# Altium PCB supersensor.PcbDoc
Units mm, origin at the board's own origin, x right, y up, seen from the top; angles counter-clockwise.
Board outline 65 x 56 mm, 2 copper layers (Top Layer, Bottom Layer); 41 components, 20 nets, 186 pads, 17 vias.
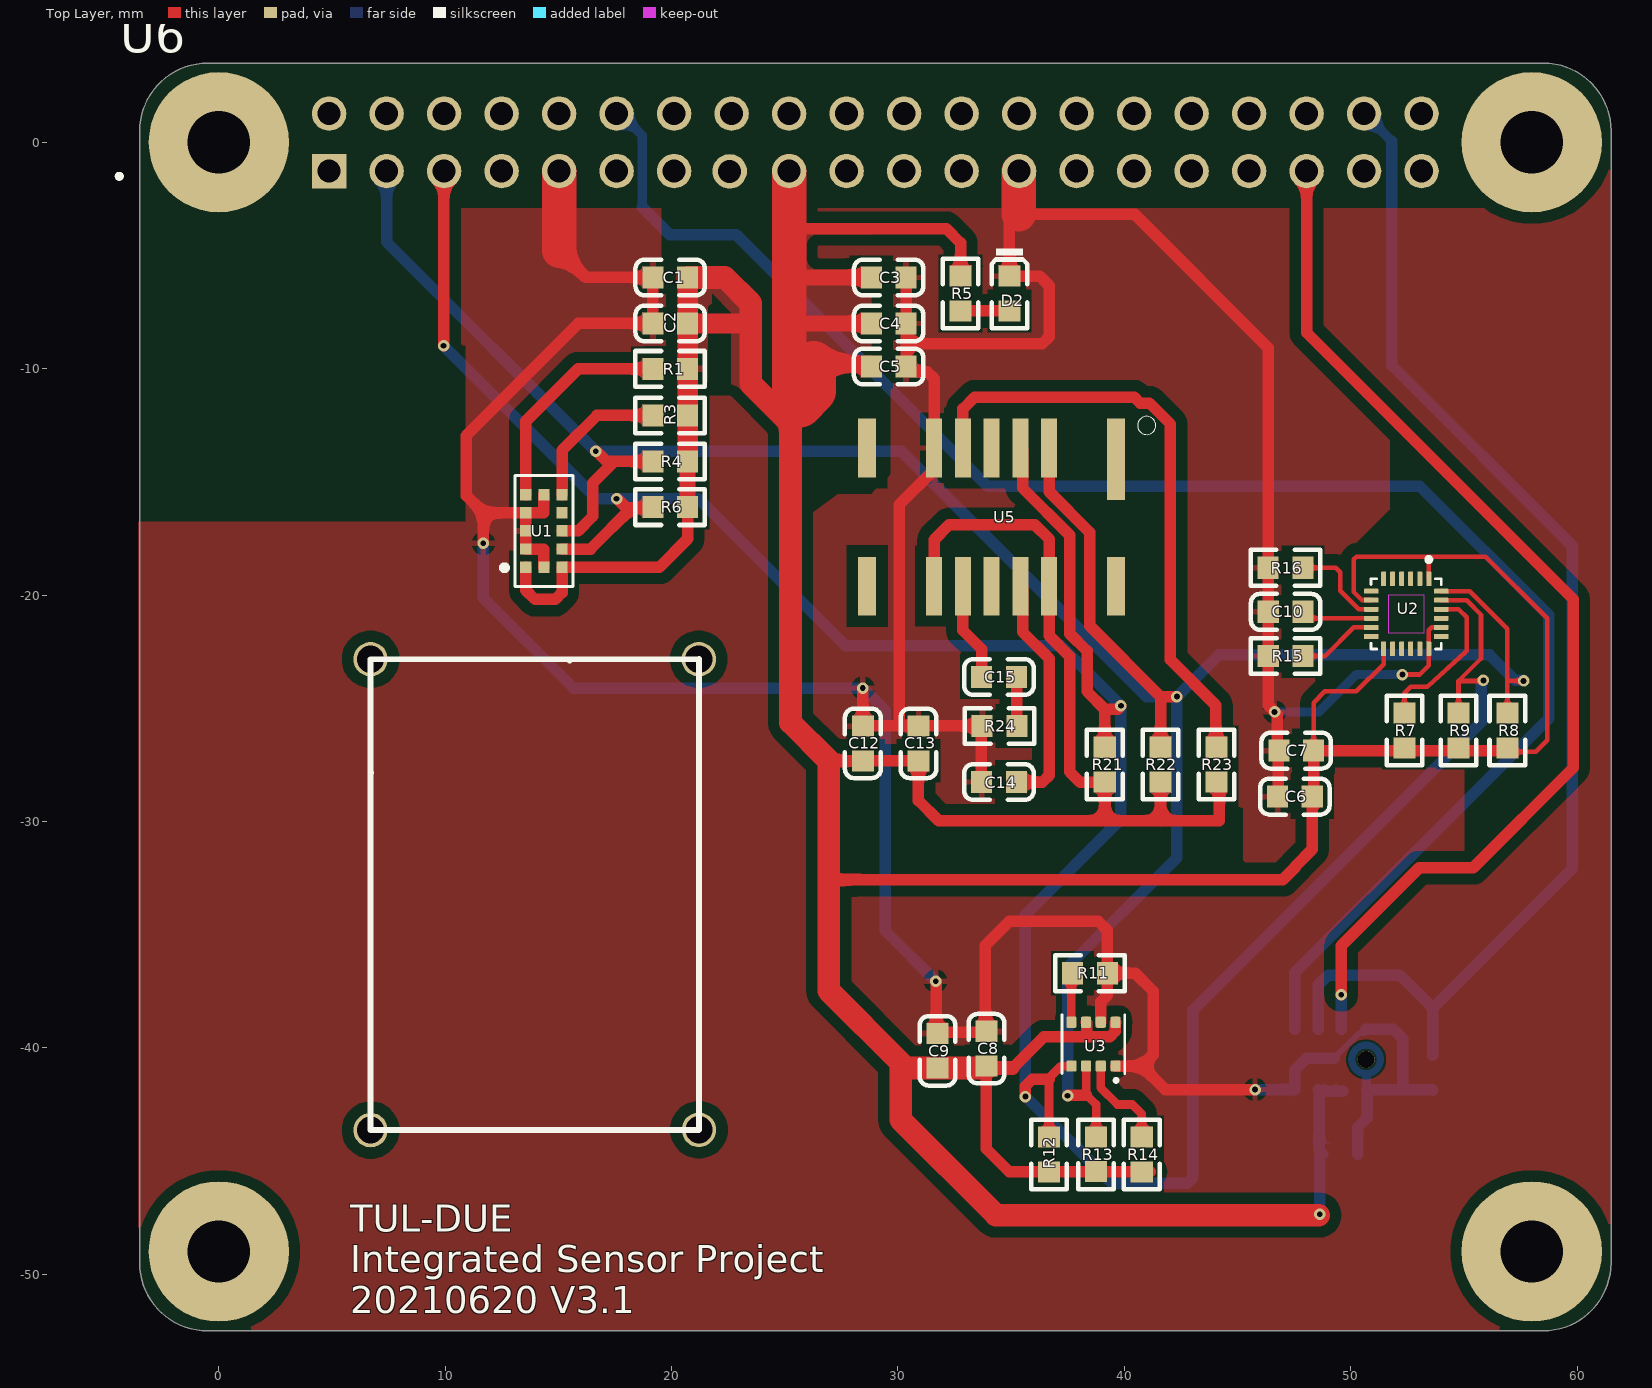
[diagram p0: Top Layer view]
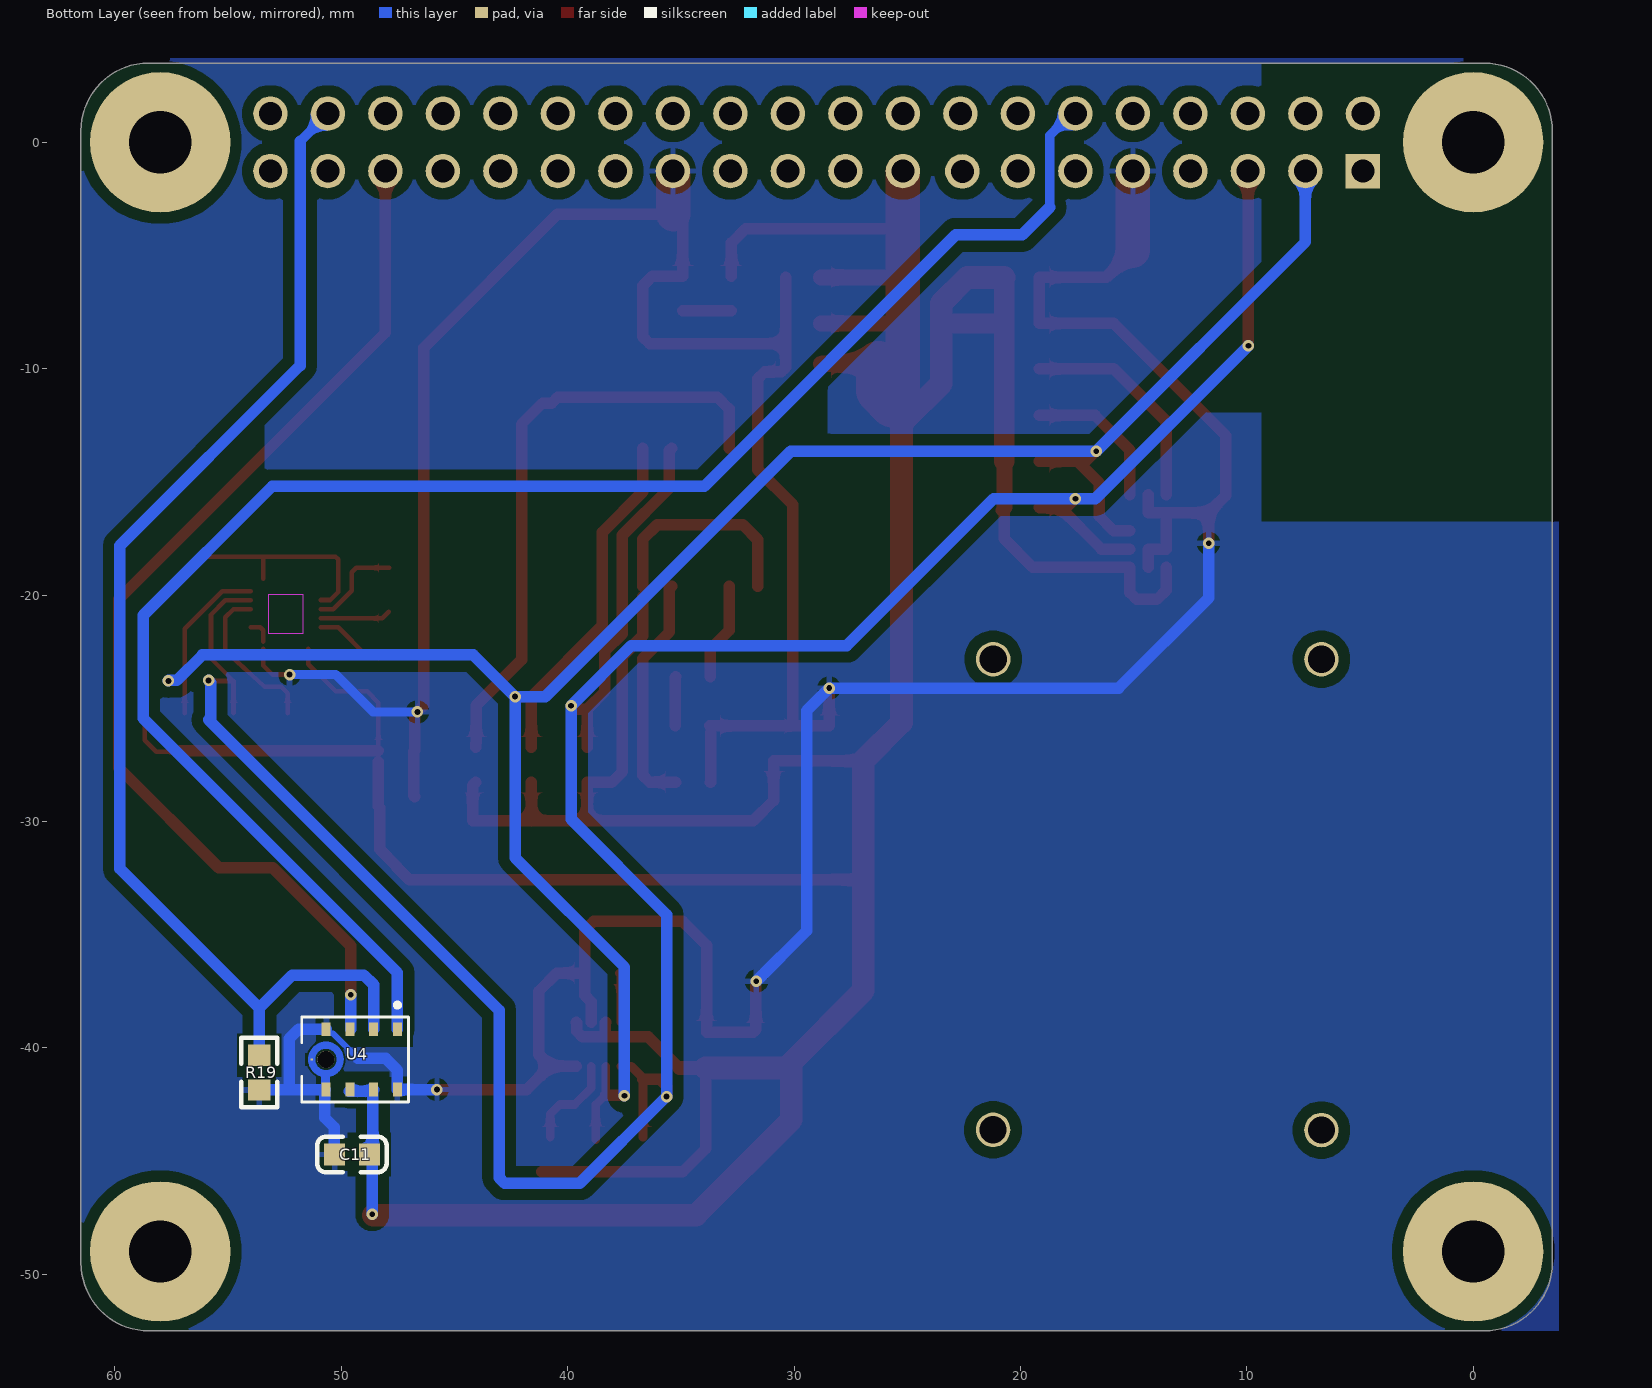
[diagram p1: Bottom Layer view, seen from below]
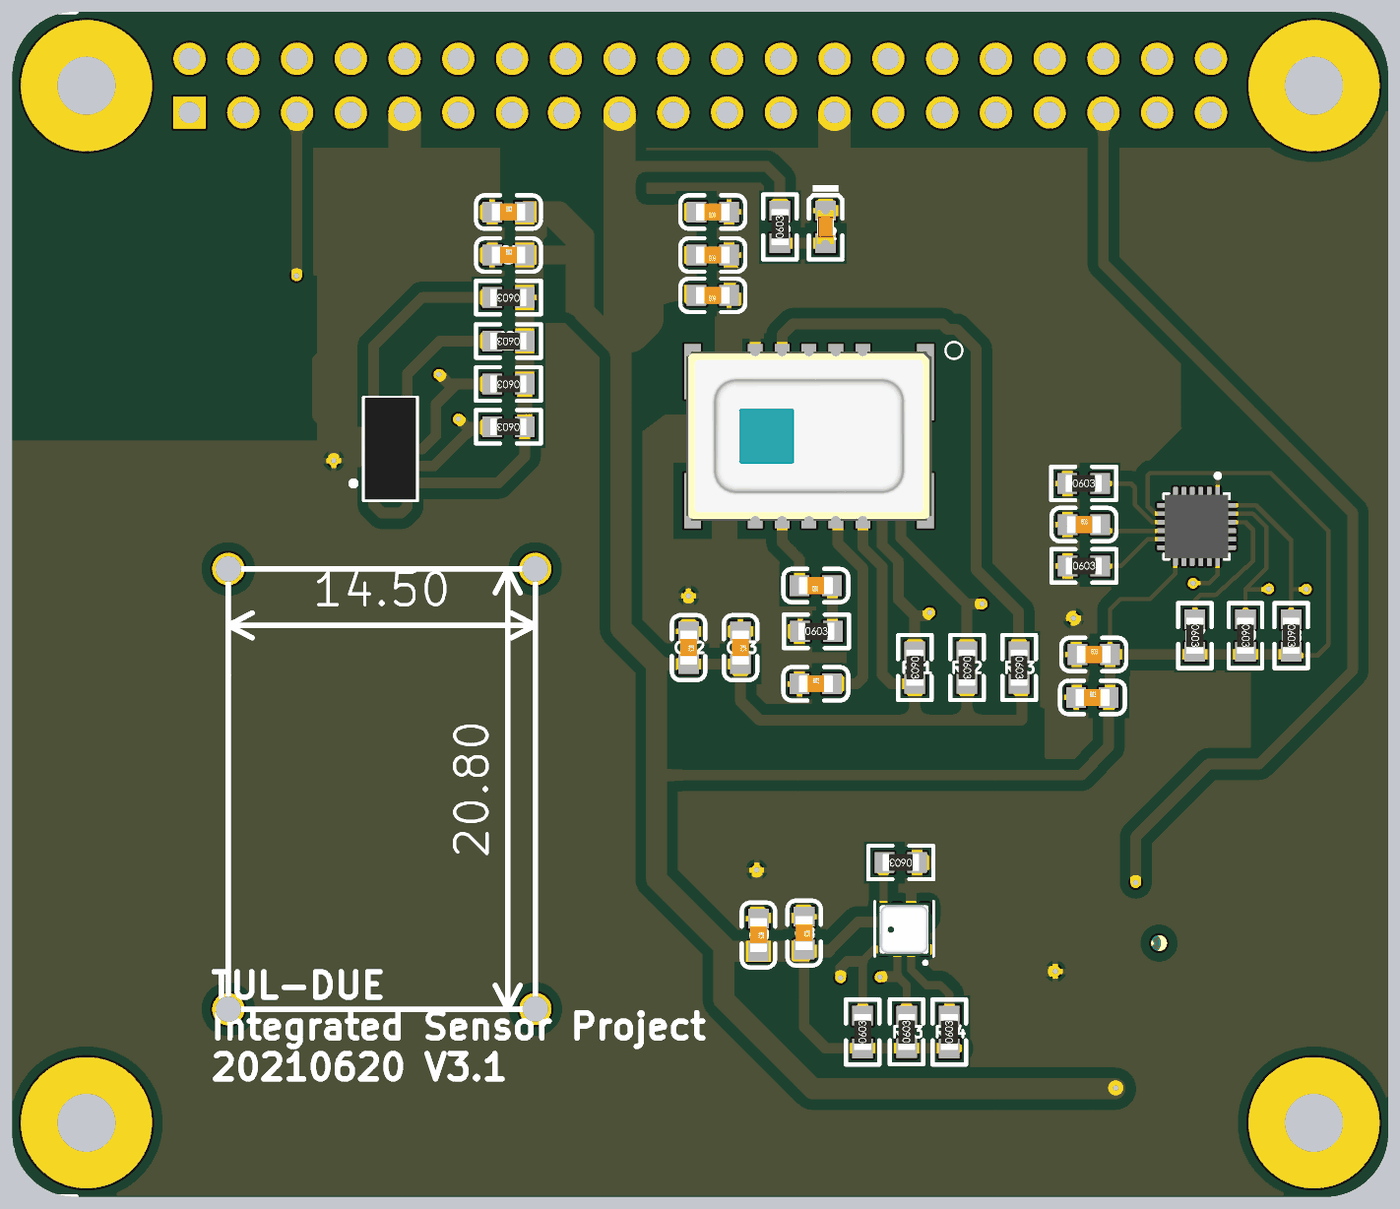
[diagram p2: 3D render of the assembled board from above, using the file's embedded part models]
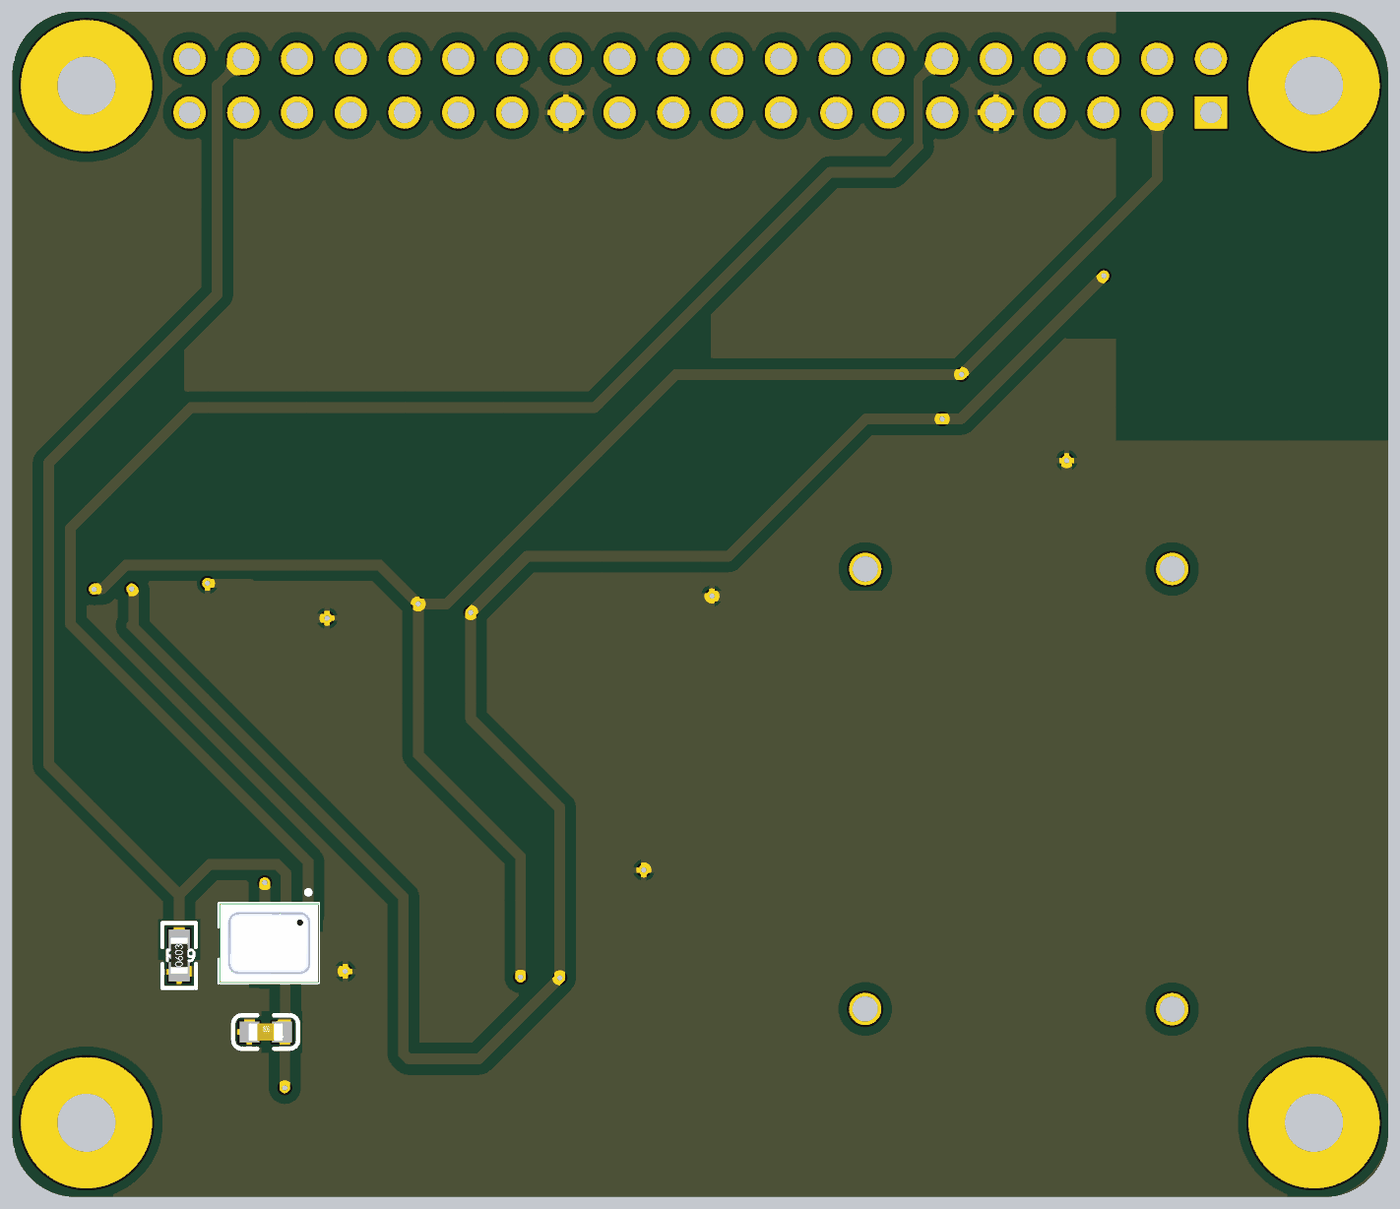
[diagram p3: 3D render of the assembled board from below, using the file's embedded part models]

## Layer stack, top to bottom
Top Solder: solder mask 0.0102, Solder Resist, Dk 3.5
Top Layer: signal copper 0.0356
Dielectric 1: dielectric 0.32, FR-4, Dk 4.8
Bottom Layer: signal copper 0.0356
Bottom Solder: solder mask 0.0102, Solder Resist, Dk 3.5

## Board outline
-3.5,-49.503 ccw(c-0.5,-49.503) -0.5,-52.503 58.5,-52.502 ccw(c58.5,-49.502) 61.5,-49.502 61.5,-49.478 61.5,0 61.5,0.5 ccw(c58.506,0.506) 58.513,3.5 -0.495,3.5 ccw(c-0.495,0.5) -3.495,0.5

## Design rules (kind name [scope] priority, off if disabled: settings)
Clearance [All] p1: gap=0.5 ignorepadtopadclearanceinfootprint=FALSE
PolygonConnect [All] p1: connectstyle=Relief reliefconductorwidth=0.254 reliefentries=4 polygonreliefangle="90 Angle" airgapwidth=0.254
RoutingVias [All] p1: holewidth=0.711 width=1.27 viastyle="Through Hole" minholewidth=0.711 minwidth=1.27 maxholewidth=0.711 maxwidth=1.27
SolderMaskExpansion [All] p1: expansion=0.102 istentingtop=FALSE
Width [All] p1: maxlimit=0.508 minlimit=0.203 preferedwidth=0.406 minimp=50.000000 maximp=50.000000 favimp=50.000000
30 further rules are at their usual default settings.

## Components (designator, comment, footprint, x,y, rotation, side; value= is the part's Value field where it differs from the comment)
C1 "" 0603_C 19.939,-5.969 r0 top
C2 "100nF" 0603_C 19.939,-8.001 r0 top
C3 "4.7uF" 0603_C 29.591,-5.969 r180 top
C4 "10uF" 0603_C 29.591,-8.001 r180 top
C5 "100nF" 0603_C 29.591,-9.906 r180 top
C6 "10nF" 0603_C 47.531,-28.905 r0 top
C7 "100nF" 0603_C 47.592,-26.873 r0 top
C8 "1uF" 0603_C 33.909,-40.039 r270 top
C9 "100nF" 0603_C 31.75,-40.132 r270 top
C10 "100nF" 0603_C 47.127,-20.738 r0 top
C11 "100nF" 0603_C 49.531,-44.712 r180 bottom
C12 "10uF" 0603_C 28.448,-26.551 r270 top
C13 "100nF" 0603_C 30.905,-26.551 r270 top
C14 "2.2uF" 0603_C 34.46,-28.26 r0 top
C15 "1uF" 0603_C 34.46,-23.619 r180 top
D2 "绿灯 0603" 0603_LED_S1 34.924,-6.676 r270 top
R1 "10KΩ" 0603_R 19.939,-10.008 r180 top
R3 "10KΩ" 0603_R 19.939,-12.065 r180 top
R4 "2.2KΩ" 0603_R 19.939,-14.097 r180 top
R5 "1KΩ" 0603_R 32.765,-6.676 r90 top
R6 "2.2KΩ" 0603_R 19.939,-16.115 r180 top
R7 "10KΩ" 0603_R 52.372,-25.984 r270 top
R8 "10KΩ" 0603_R 56.92,-25.984 r270 top
R9 "10KΩ" 0603_R 54.761,-25.984 r270 top
R11 "10KΩ" 0603_R 38.478,-36.703 r180 top
R12 "10KΩ" 0603_R 36.672,-44.712 r90 top
R13 "10KΩ" 0603_R 38.751,-44.704 r90 top
R14 "" 0603_R 40.767,-44.712 r90 top
R15 "10KΩ" 0603_R 47.127,-22.693 r0 top
R16 "10KΩ" 0603_R 47.117,-18.796 r0 top
R19 "100KΩ" 0603_R 53.62,-41.1 r90 bottom
R21 "4.7KΩ" 0603_R 39.136,-27.493 r270 top
R22 "4.7KΩ" 0603_R 41.601,-27.493 r270 top
R23 "10KΩ" 0603_R 44.066,-27.493 r270 top
R24 "20Ω" 0603_R 34.488,-25.781 r0 top
U1 "VL53L1X" VL53L1X 14.361,-17.165 r180 top
U2 "9250" MPU9250 52.451,-20.828 r270 top
U3 "280" BME280 38.634,-39.839 r270 top
U4 "441" INMP441 49.388,-40.513 r180 bottom
U5 "GRIDEYE" AMG8833 34.138,-16.558 r180 top
U6 "PIN20" PIN20 39,-24.5 r0 top

## Footprints (in the part's own frame and the unit in brackets; to place one, negate y for a bottom-side part, rotate by r counter-clockwise, add the part's x,y. Pads: shape width x height; smd on the part's side, far side on the other; paste and mask are expansions set on the pad)
0603_C [mm]
  rect 0.93x0.98 smd: 1(-0.77,0) 2(0.77,0)
  silkscreen extent -1.54,-0.79 1.54,0.79, body extent -0.8,-0.4 0.8,0.4, height 0.3
0603_LED_S1 [mm]
  rect 0.93x0.98 smd: A(0.77,0) K(-0.77,0)
  silkscreen extent -1.98,-0.79 1.53,0.79, body extent -0.8,-0.4 0.8,0.4, height 0.6
0603_R [mm]
  rect 0.93x0.98 smd: 1(-0.77,0) 2(0.77,0)
  silkscreen extent -1.53,-0.79 1.54,0.79, body extent -0.85,-0.4 0.85,0.4, height 0.56
AMG8833 [mm]
  rect 0.8x3.6 smd: 1(-5.5,-2.55)
  rect 0.7x2.6 smd: 2(-2.54,-3.05) 3(-1.27,-3.05) 4(0,-3.05) 5(1.27,-3.05) 6(2.54,-3.05) 9(2.54,3.05) 10(1.27,3.05) 11(0,3.05) 12(-1.27,3.05) 13(-2.54,3.05)
  rect 0.8x2.6 smd: 7(5.5,-3.05) 8(5.5,3.05) 14(-5.5,3.05)
  silkscreen extent -7.25,-4.45 -6.45,-3.65, body extent -5.8,-4 5.8,4, height 4.3
BME280 [mm]
  rrect25% 0.49x0.45 smd: 1(0.97,0.975) 2(0.97,0.325) 3(0.97,-0.325) 4(0.97,-0.975) 5(-0.97,-0.975) 6(-0.97,-0.325) 7(-0.97,0.325) 8(-0.97,0.975)
  silkscreen extent -1.3,-1.39 1.65,1.38, body extent -1.22,-1.25 1.28,1.25, height 1
INMP441 [mm]
  rect 0.4x0.6 smd paste-1: 1(1.87,1.33) 2(0.82,1.33) 3(-0.23,1.33) 4(-1.28,1.33) 6(-1.28,-1.33) 7(-0.23,-1.33) 8(0.82,-1.33) 9(1.87,-1.33)
  rect 0.1x0.1 smd paste-1 mask+0: 5(-1.92,0)
  round 0.75 hole 0.75 unplated: ""(-1.29,0)
  Top Layer region: 243 vertices and 0 holes, not listed, extent -2.07,-0.78 -0.51,0.78
  silkscreen extent -2.36,-1.88 2.36,2.5, body extent -2.33,-1.88 2.39,1.88, height 1.05
MPU9250 [mm]
  rrect25% 0.64x0.22 smd: 1(-1.545,1) 2(-1.545,0.6) 3(-1.545,0.2) 4(-1.545,-0.2) 5(-1.545,-0.6) 6(-1.545,-1) 13(1.545,-1) 14(1.545,-0.6) 15(1.545,-0.2) 16(1.545,0.2) 17(1.545,0.6) 18(1.545,1)
  rrect25% 0.22x0.64 smd: 7(-1,-1.545) 8(-0.6,-1.545) 9(-0.2,-1.545) 10(0.2,-1.545) 11(0.6,-1.545) 12(1,-1.545) 19(1,1.545) 20(0.6,1.545) 21(0.2,1.545) 22(-0.2,1.545) 23(-0.6,1.545) 24(-1,1.545)
  Keep-Out Layer region: 0.85,-0.77 -0.85,-0.77 -0.85,0.77 0.85,0.77
  Keep-Out Layer region: 0.85,-0.77 -0.85,-0.77 -0.85,0.77 0.85,0.77
  silkscreen extent -2.5,-1.55 1.55,1.55, body extent -1.5,-1.5 1.5,1.5, height 1
PIN20 [mil]
  rect 60x60 hole 40: 1(-1343.7,914.57)
  round 60 hole 40: 2(-1343.7,1014.57) 3(-1243.7,914.57) 4(-1243.7,1014.57) 5(-1143.7,914.57) 6(-1143.7,1014.57) 7(-1043.7,914.57) 8(-1043.7,1014.57) 9(-943.7,914.57) 10(-943.7,1014.57) 11(-843.7,914.57) 12(-843.7,1014.57) 13(-743.7,914.57) 14(-743.7,1014.57) 15(-647,914) 16(-643.7,1014.57) 17(-543.7,914.57) 18(-543.7,1014.57) 19(-443.7,914.57) 20(-443.7,1014.57) 21(-343.7,914.57) 22(-343.7,1014.57) 23(-243.7,914.57) 24(-243.7,1014.57) 25(-143.7,914.57) 26(-143.7,1014.57) 27(-43.7,914.57) 28(-43.7,1014.57) 29(56.3,914.57) 30(56.3,1014.57) 31(156.3,914.57) 32(156.3,1014.57) 33(256.3,914.57) 34(256.3,1014.57) 35(356.3,914.57) 36(356.3,1014.57) 37(456.3,914.57) 38(456.3,1014.57) 39(556.3,914.57) 40(556.3,1014.57)
  round 244.09 hole 108.27: S1(-1535.43,964.57) S2(748.03,964.57) S3(748.03,-964.57) S4(-1535.43,-964.57)
  silkscreen extent -1713,902 -1705,909
VL53L1X [mm]
  rect 0.5x0.5 smd: 1(0.8,1.6) 2(0.8,0.8) 3(0.8,0) 4(0.8,-0.8) 5(0.8,-1.6) 6(0,-1.6) 7(-0.8,-1.6) 8(-0.8,-0.8) 9(-0.8,0) 10(-0.8,0.8) 11(-0.8,1.6) 12(0,1.6)
  silkscreen extent -1.28,-2.45 1.87,2.45, body extent -1.2,-2.41 1.2,2.39, height 1.4

## Part data
C1 C3: library part "0603 4.7uF (475) 10% 16V", "贴片电容", Package=0603, SuppliersPartNumber=C19666, ComponentLink1Description=供应商链接, ComponentLink1URL=http://www.szlcsc.com/product/details_20375.html, Supplier=LC
C2 C5 C7 C9 C10 C11 C13: library part "0603 100nF (104) 10% 50V", "贴片电容", Package=0603, SuppliersPartNumber=C14663, ComponentLink1Description=供应商链接, ComponentLink1URL=http://www.szlcsc.com/product/details_15331.html, Supplier=LC
C4 C12: library part "0603 10uF (106) 10% 10V", "贴片电容", Package=0603, SuppliersPartNumber=C19702, ComponentLink1Description=供应商链接, ComponentLink1URL=http://www.szlcsc.com/product/details_20411.html, Supplier=LC
C6: library part "0603 10nF (103) 10% 50V", "贴片电容", Package=0603, SuppliersPartNumber=C57112, ComponentLink1Description=供应商链接, ComponentLink1URL=http://www.szlcsc.com/product/details_58143.html, Supplier=LC
C8 C15: library part "0603 1uF (105) 10% 50V", "贴片电容", Package=0603, SuppliersPartNumber=C15849, ComponentLink1Description=供应商链接, ComponentLink1URL=http://www.szlcsc.com/product/details_16531.html, Supplier=LC
C14: library part "0603 2.2uF (225) 10% 16V", "贴片电容", Package=0603, SuppliersPartNumber=C23630, ComponentLink1Description=供应商链接, ComponentLink1URL=http://www.szlcsc.com/product/details_24366.html, Supplier=LC
D2: library part "0603 绿灯", "发光二极管", Package=0603, SuppliersPartNumber=C72043, ComponentLink1Description=供应商链接, ComponentLink1URL=http://www.szlcsc.com/product/details_73152.html, Supplier=LC
R1 R3 R7 R8 R9 R11 R12 R13 R14 R15 R16 R23: library part "0603 10KΩ (1002) 1%", "贴片电阻", Package=0603, SuppliersPartNumber=C25804, ComponentLink1Description=供应商链接, ComponentLink1URL=http://www.szlcsc.com/product/details_26547.html, Supplier=LC
R4 R6: library part "0603 2.2KΩ (2201) 1%", "贴片电阻", Package=0603, SuppliersPartNumber=C4190, ComponentLink1Description=供应商链接, ComponentLink1URL=http://www.szlcsc.com/product/details_4597.html, Supplier=LC
R5: library part "0603 1KΩ (1001) 1%", "贴片电阻", Package=0603, SuppliersPartNumber=C21190, ComponentLink1Description=供应商链接, ComponentLink1URL=http://www.szlcsc.com/product/details_21904.html, Supplier=LC
R19: library part "0603 100KΩ (1003) 1%", "贴片电阻", Package=0603, SuppliersPartNumber=C25803, ComponentLink1Description=供应商链接, ComponentLink1URL=http://www.szlcsc.com/product/details_26546.html, Supplier=LC
R21 R22: library part "0603 4.7KΩ (4701) 1%", "贴片电阻", Package=0603, SuppliersPartNumber=C23162, ComponentLink1Description=供应商链接, ComponentLink1URL=http://www.szlcsc.com/product/details_23889.html, Supplier=LC
R24: library part "0603 20Ω (20R0) 1%", "贴片电阻", Package=0603, SuppliersPartNumber=C22950, ComponentLink1Description=供应商链接, ComponentLink1URL=http://www.szlcsc.com/product/details_23677.html, Supplier=LC
U1 U5: "IC"
U2: library part MPU9250, "IC"
U3: library part BME280, "IC"
U4: library part INMP441, "IC"
U6: "BCM2837B0 Raspberry Pi 3 Model B+ - ARM庐 Cortex庐-A53, VideoCore MPU Embedded Evaluation Board", Package="Raspberry Pi", Check_prices=https://www.snapeda.com/parts/RASPBERRY%20PI%203%20MODEL%20B+/Raspberry%20Pi/view-part/4299836/?ref=eda, Digi-Key_Part_Number=1690-1025-ND, MF="Raspberry Pi", MP="RASPBERRY PI 3 MODEL B+", SnapEDA_Link=https://www.snapeda.com/parts/RASPBERRY%20PI%203%20MODEL%20B+/Raspberry%20Pi/view-part/4299836/?ref=snap

## Free pads (board coordinates)
  round 1.524 hole 1.2: 4(6.702,-43.635) 4(6.702,-22.835) 4(21.202,-22.835) 4(21.209,-43.622)

## Via types
v1: diameter 0.508, hole 0.254, Top Layer to Bottom Layer, 17 vias

## Nets (pads, with @x,y where several pads share a name; then routed paths per layer and width w, separated by ;. In a path a pad name is that pad's centre, name@x,y a point inside that pad or via, vN(x,y) a via of type N, cw(c..) or ccw(c..) an arc to the next point about the centre after c; other vN are vias at no path point)
3.3V: C1.2 C2.2 C3.2 C4.2 C5.2 C6.2 C7.2 C8.2 C9.2 C11.2 C12.2 C13.2 R1.1 R3.1 R4.1 R5.2 R6.1 R7.2 R8.2 R9.2 R12.1 R13.1 R14.1 R21.2 R22.2 R23.2 U1.1 U1.11 U2.1 U2.8 U2.13 U3.6 U3.8 U4.7 U4.8 U5.9 U5.13 U6.17 | length 259.1
  Top Layer w0.203: 48.362,-27.363 C7.2 48.362,-24.749 48.854,-24.257 50.244,-24.257 51.451,-23.05 U2.13 ; U2.8 50.898,-20.22 50.489,-20.22 50.134,-19.865 50.134,-18.425 50.254,-18.306 53.451,-18.306 ; U2.1 53.451,-18.306 ; R8.2@57.081,-26.873 57.132,-26.924 58.166,-26.924 58.674,-26.416 58.674,-21.028 55.952,-18.306 53.451,-18.306
  Top Layer w0.406: 25.19,-11.135 25.658,-11.603
  Top Layer w0.508: U1.1 13.561,-19.784 13.97,-20.193 14.859,-20.193 15.161,-19.891 U1.11 19.462,-18.765 20.709,-17.518 R6.1 R6.1@20.85,-16.256 ; 25.273,-5.969 25.273,-8.001 25.273,-8.781 26.271,-9.779 ; 25.516,-5.969 25.516,-3.81 32.131,-3.81 32.765,-4.444 R5.2 ; 26.94,-32.572 46.999,-32.572 47.571,-32.001 47.571,-31.964 48.301,-31.234 48.301,-29.395 48.362,-29.334 48.362,-28.905 48.362,-27.363 ; 26.94,-27.321 C12.2 C13.2 30.905,-29.079 31.797,-29.972 39.136,-29.972 ; 30.115,-40.656 30.353,-40.894 ; U5.9 31.598,-17.551 32.258,-16.891 36.043,-16.891 36.678,-17.526 U5.13 ; C8.2@33.909,-40.956 33.909,-44.466 34.925,-45.482 R12.1 38.751,-45.482 R14.1 R14.1@41.148,-45.482 ; 35.068,-40.894 36.441,-39.521 38.261,-39.521 ; U5.13@36.678,-20.066 36.678,-21.798 37.592,-22.713 37.592,-27.813 38.042,-28.263 R21.2 39.136,-29.972 ; U3.6 38.328,-38.888 38.328,-39.454 38.261,-39.521 ; U3.8 39.591,-38.888 39.591,-39.28 39.35,-39.521 38.261,-39.521 ; R22.2 41.601,-29.972 ; R23.2 44.196,-28.393 44.196,-29.972 41.601,-29.972 ; C7.2 52.372,-26.873 54.761,-26.873 R8.2@57.081,-26.873 ; v1@48.594,-47.391 v1(48.632,-47.353) ; 39.136,-29.972 41.601,-29.972
  Top Layer w0.6: C8.2@33.909,-40.894 35.068,-40.894
  Top Layer w0.7: R6.1 R4.1 ; 25.313,-8.001 C4.2 ; 25.516,-5.969 C3.2 ; 26.271,-9.779 C5.2@28.821,-9.779
  Top Layer w0.9: R4.1 R3.1 R1.1 C2.2 ; C1.2 C2.2 ; 22.976,-8.001 C2.2
  Top Layer w1: C1.2 22.352,-5.969 23.495,-7.112 23.495,-10.668 25.141,-12.314 ; 25.252,-12.267 25.252,-25.633 26.94,-27.321 26.94,-32.572 26.94,-37.481 30.115,-40.656 30.115,-43.177 34.329,-47.391 v1@48.594,-47.391 ; 30.353,-40.894 31.75,-40.894 C8.2@33.909,-40.894
  Top Layer w1.524: 25.19,-11.135 25.19,-8.781 25.19,-8.001 25.19,-5.969 25.19,-3.81 U6.17
  Top Layer w2: 25.658,-11.603 26.271,-10.99 26.271,-9.779
  Bottom Layer w0.508: U4.8 48.605,-41.88 48.605,-44.557 C11.2 48.632,-44.841 v1(48.632,-47.353) ; U4.8@48.608,-41.923 U4.7@49.65,-41.923
GND: C1.1 C2.1 C3.1 C4.1 C5.1 C6.1 C7.1 C8.1 C9.1 C10.1 C11.1 C12.1 C13.1 C14.1 D2.K R11.1 R15.1 R16.1 R19.1 R24.1 U1.2 U1.3 U1.4 U1.6 U1.12 U2.18 U2.20 U3.1 U3.7 U4.4 U4.5 U4.6 U4.9 U5.6 U6.9 U6.25 | length 204.3
  Top Layer w0.203: v1(52.285,-23.51) 53.051,-23.51 53.451,-23.11 U2.18 ; 53.451,-22.053 53.451,-21.559 53.582,-21.428 U2.20
  Top Layer w0.508: v1(11.684,-17.715) 11.684,-16.365 ; U1.12 14.361,-17.965 U1.2 U1.3 U1.4 ; U1.6 14.361,-16.365 U1.4 ; 15.03,-4.791 16.208,-5.969 C1.1 C2.1 15.875,-8.001 10.922,-12.954 10.922,-15.603 11.684,-16.365 ; v1(28.448,-24.109) C12.1 30.069,-25.781 ; C3.1 C4.1 30.361,-8.89 ; v1(31.666,-37.057) 31.686,-37.076 31.686,-39.205 31.796,-39.316 33.863,-39.316 33.863,-35.474 34.92,-34.417 38.854,-34.417 39.248,-34.811 R11.1 ; C14.1@33.674,-28.277 C14.1 33.679,-28.248 R24.1@33.679,-26.09 ; R24.1 C13.1 30.069,-25.781 ; 35.343,-3.18 35.373,-3.18 ; U3.7 38.959,-37.973 39.248,-37.684 R11.1 ; U3.1 40.767,-40.809 ; v1(45.777,-41.843) 41.801,-41.843 40.767,-40.809 ; v1(46.634,-25.162) 46.634,-25.146 46.357,-24.869 R15.1 46.352,-22.688 46.352,-20.738 46.352,-18.801 R16.1 46.347,-9.07 40.457,-3.18 35.373,-3.18 ; v1@46.642,-25.154 46.761,-25.273 46.761,-26.873 46.791,-26.903 46.791,-28.874 C6.1 ; 11.684,-16.365 U1.4 ; 30.069,-25.781 30.05,-25.762 30.05,-16.006 31.598,-14.458 U5.6 31.598,-10.44 31.3,-10.142 30.572,-10.142 30.361,-9.931 C5.1 30.361,-8.89 ; 30.361,-8.89 36.38,-8.89 36.678,-8.592 36.678,-6.326 36.576,-6.224 36.259,-5.906 D2.K 34.924,-3.628 35.373,-3.18 ; R11.1 40.48,-36.703 41.269,-37.492 41.269,-40.308 40.767,-40.809
  Top Layer w1.524: 15.03,-4.791 U6.9 ; 35.343,-3.18 U6.25@35.343,-1.277
  Bottom Layer w0.254: 49.268,-40.466 50.377,-39.356 50.595,-39.356 50.668,-39.283 U4.4
  Bottom Layer w0.406: v1(46.634,-25.162) 48.599,-25.162 50.251,-23.51 v1(52.285,-23.51) ; 50.698,-41.292 50.698,-41.849 50.698,-41.873 U4.6@50.737,-41.912
  Bottom Layer w0.508: v1(11.684,-17.715) 11.684,-20.129 15.664,-24.109 v1(28.448,-24.109) 29.448,-25.109 29.448,-34.838 v1(31.666,-37.057) ; v1(45.777,-41.843) U4.9 47.518,-40.99 48.043,-40.466 49.268,-40.466 ; C11.1 50.301,-43.518 50.737,-43.082 U4.6@50.737,-41.912 ; U4.4 51.887,-39.183 52.297,-39.593 52.297,-41.849 ; U4.6@50.698,-41.849 52.297,-41.849 ; R19.1 53.6,-41.849 52.297,-41.849
IIC_SCL: R6.2 R9.1 R12.2 R21.1 U1.10 U2.23 U3.4 U5.3 U6.5 | length 134.1
  Top Layer w0.203: U2.23 55.12,-20.228 55.753,-20.861 55.753,-22.805 54.761,-23.796 ; R9.1 54.761,-23.796 ; v1(55.864,-23.773) 55.84,-23.796 54.761,-23.796
  Top Layer w0.381: 36.64,-41.367 37.187,-40.82 37.649,-40.82 U3.4 ; R12.2 36.672,-41.382 36.672,-41.367
  Top Layer w0.508: v1(9.927,-8.983) 9.939,-8.971 U6.5@9.939,-1.281 ; U1.10 16.42,-17.965 18.24,-16.146 ; v1(17.566,-15.747) 17.594,-15.747 17.992,-16.146 18.24,-16.146 ; R6.2 19.139,-16.146 18.24,-16.146 ; U5.3 35.504,-13.604 35.504,-15.269 37.592,-17.358 37.592,-21.707 38.354,-22.469 38.354,-24.257 39.136,-25.039 ; v1(35.631,-42.151) 35.631,-41.69 35.938,-41.382 36.672,-41.382 ; R21.1 39.136,-25.039 ; v1(39.847,-24.895) 39.702,-25.039 39.136,-25.039
  Bottom Layer w0.508: v1(9.927,-8.983) 16.692,-15.747 v1(17.566,-15.747) 21.186,-15.747 27.672,-22.233 37.184,-22.233 v1(39.847,-24.895) 39.847,-29.906 35.631,-34.122 v1(35.631,-42.151) 39.461,-45.982 42.787,-45.982 43.025,-45.744 43.025,-38.35 55.864,-25.511 ; 55.769,-25.511 55.769,-23.868 v1(55.864,-23.773)
IIC_SDA: R4.2 R8.1 R13.2 R22.1 U1.9 U2.24 U3.3 U5.2 U6.3 | length 118
  Top Layer w0.203: U2.24 55.259,-19.828 56.92,-21.489 R8.1 ; 56.924,-23.792 v1(57.636,-23.792)
  Top Layer w0.381: U3.3 38.309,-42.063 38.751,-42.505 R13.2 R13.2@38.751,-44.061
  Top Layer w0.508: U1.9 15.871,-17.165 16.51,-16.527 16.51,-15.057 17.47,-14.097 ; v1(16.65,-13.643) 16.678,-13.643 17.132,-14.097 17.47,-14.097 ; R4.2 17.47,-14.097 ; U5.2 36.678,-15.437 38.476,-17.236 38.476,-21.361 41.601,-24.486 ; v1(37.491,-42.119) 37.51,-42.099 38.273,-42.099 38.309,-42.063 ; R22.1 41.601,-24.486 ; v1(42.325,-24.486) 41.601,-24.486
  Bottom Layer w0.508: U6.3 7.41,-4.402 v1(16.65,-13.643) 30.142,-13.643 40.985,-24.486 v1(42.325,-24.486) ; v1(37.491,-42.119) 37.491,-36.433 42.325,-31.598 v1(42.325,-24.486) ; v1(57.636,-23.792) 57.616,-23.773 57.264,-23.773 56.135,-22.643 44.168,-22.643 v1(42.325,-24.486)
Mic_SCK: U4.1 U6.12 | length 75
  Bottom Layer w0.406: U6.12@17.737,1.27 18.706,0.301 18.706,-2.869
  Bottom Layer w0.508: 18.706,-2.869 19.924,-4.086 22.854,-4.086 33.968,-15.201 53.058,-15.201 58.754,-20.896 58.754,-25.448 47.518,-36.684 U4.1
Mic_SD: R19.2 U4.2 U6.38 | length 55.8
  Bottom Layer w0.406: U6.38 51.823,0.037
  Bottom Layer w0.508: U4.2 48.568,-37.219 49.002,-36.785 52.163,-36.785 53.62,-38.242 ; 51.823,0.037 51.823,-9.862 59.783,-17.822 59.783,-32.079 53.62,-38.242 ; R19.2 53.62,-38.242
Mic_WS: U4.3 U6.35 | length 48.4
  Top Layer w0.508: U6.35 48.05,-8.405 59.82,-20.175 59.82,-27.637 55.41,-32.047 53.027,-32.047 49.578,-35.496 v1(49.578,-37.656)
  Bottom Layer w0.508: U4.3@49.576,-39.185 49.578,-39.183 v1(49.578,-37.656)
NetC10_2: C10.2 U2.10 | length 3.1
  Top Layer w0.203: C10.2 48.187,-21.028 U2.10
NetC14_2: C14.2 U5.12 | length 10.5
  Top Layer w0.508: C14.2 36.38,-28.26 36.678,-27.962 36.678,-22.804 35.504,-21.63 35.504,-19.704 U5.12
NetC15_1: C15.1 R24.2 | length 2.2
  Top Layer w0.508: C15.1 35.244,-23.633 35.244,-25.767 R24.2
NetC15_2: C15.2 U5.10 | length 4.4
  Top Layer w0.508: U5.10 32.868,-21.565 33.69,-22.387 C15.2
NetD2_A: D2.A R5.1 | length 2.2
  Top Layer w0.508: R5.1 D2.A
NetR1_2: R1.2 U1.5 | length 9.8
  Top Layer w0.508: U1.5 13.561,-12.319 15.872,-10.008 R1.2
NetR3_2: R3.2 U1.7 | length 6.6
  Top Layer w0.508: U1.7 15.161,-13.607 16.703,-12.065 R3.2
NetR7_1: R7.1 U2.22 | length 7.1
  Top Layer w0.203: R7.1 52.372,-24.332 52.651,-24.053 53.296,-24.053 53.374,-24.053 53.433,-24 55.057,-22.517 55.06,-22.514 55.12,-22.454 55.12,-20.987 54.761,-20.628 U2.22
NetR11_2: R11.2 U3.5 | length 2.2
  Top Layer w0.381: U3.5 37.659,-36.752 R11.2
NetR14_2: R14.2 U3.2 | length 4.3
  Top Layer w0.381: U3.2 38.959,-41.77 39.694,-42.505 40.346,-42.505 40.767,-42.926 R14.2
NetR15_2: R15.2 U2.11 | length 3.5
  Top Layer w0.203: R15.2@47.972,-22.693 48.869,-22.693 50.134,-21.428 U2.11
NetR16_2: R16.2 U2.9 | length 4.3
  Top Layer w0.203: R16.2 49.346,-18.796 49.54,-18.991 49.54,-19.81 50.35,-20.62 50.898,-20.62 U2.9
NetR23_1: R23.1 U5.5 | length 26.7
  Top Layer w0.508: U5.5 32.868,-11.779 33.392,-11.254 40.433,-11.254 40.695,-11.517 41.108,-11.517 42.037,-12.446 42.037,-22.86 44.041,-24.864 44.041,-26.512 44.066,-26.537 R23.1
pads on no net: U1.8 U2.2 U2.3 U2.4 U2.5 U2.6 U2.7 U2.12 U2.14 U2.15 U2.16 U2.17 U2.19 U2.21 U4. U5.1 U5.4 U5.7 U5.8 U5.11 U5.14 U6.1 U6.2 U6.4 U6.6 U6.7 U6.8 U6.10 U6.11 U6.13 U6.14 U6.15 U6.16 U6.18 U6.19 U6.20 U6.21 U6.22 U6.23 U6.24 U6.26 U6.27 U6.28 U6.29 U6.30 U6.31 U6.32 U6.33 U6.34 U6.36 U6.37 U6.39 U6.40 U6.S1 U6.S2 U6.S3 U6.S4

## Polygon pours and split planes (outlines as drawn)
GND on Top Layer "GND_L01_P000" (solid, remove dead copper, pour order 0): -3.409,3.5 61.525,3.5 61.521,3.496 61.521,-52.446 -0.443,-52.446 -0.5,-52.503 -0.629,-52.374 -3.57,-52.374 -3.57,0.425 -3.495,0.5
3.3V on Top Layer "3.3V_L01_P006" (solid, remove dead copper, pour order 6): 20.709,-5.969 20.709,-8.001 21.199,-8.491 23.495,-8.491 23.495,-7.112 22.352,-5.969
3.3V on Top Layer "3.3V_L01_P005" (solid, remove dead copper, pour order 5): 20.709,-5.969 20.709,-16.256 21.058,-16.605 25.252,-16.605 25.252,-12.267 23.495,-10.509 23.495,-7.112 22.352,-5.969
3.3V on Top Layer "3.3V_L01_P004" (solid, remove dead copper, pour order 4): 28.821,-9.906 28.821,-3.575 28.586,-3.81 25.273,-3.81 25.273,-8.613 25.141,-8.745 26.175,-9.779 26.271,-9.779
GND on Bottom Layer "GND_L02_P002" (solid, remove dead copper, pour order 2): -3.409,3.5 -3.792,3.116 -3.792,-52.503 61.464,-52.503 61.521,-52.446 61.5,-52.424 61.5,3.704 -3.204,3.704 -3.409,3.5

## Other copper
Top Layer:
  pour cut-out: 51.723,-13.081 51.723,-16.147 51.755,-16.178 50.134,-17.799 50.134,-17.872 55.573,-17.872 55.978,-17.468 55.978,-16.835
  pour cut-out: 55.011,-31.478 55.011,-27.637 59.092,-27.637
  pour cut-out: 45.256,-29.428 45.259,-29.431 45.259,-31.715 28.063,-31.715 27.958,-31.61 27.958,-28.133 30.081,-28.133 30.415,-28.467 30.415,-29.672 31.395,-30.652 44.556,-30.652 44.556,-29.781 45.004,-29.334
  pour cut-out: 8.399,-0.119 8.399,-2.918 56.687,-2.918 56.778,-2.827 56.778,2.849 8.385,2.849 8.218,2.682
  pour cut-out: 21.766,-6.656 22.639,-7.529 22.639,-11.135 22.577,-11.198 21.604,-11.198 21.604,-7.274 21.766,-7.112
  pour cut-out: 19.544,-2.522 24.428,-2.609 24.428,-6.995 24.311,-7.112 22.678,-5.479 19.544,-5.225
  pour cut-out: 28.01,-11.135 26.952,-11.603 25.842,-12.713 26.01,-16.527 27.331,-15.538 28.81,-15.538 29.688,-14.661 29.688,-10.689
  pour cut-out: 9.362,-9.453 10.27,-9.453 10.751,-8.971 10.901,-8.971 10.901,-16.74 10.922,-16.762 8.89,-16.762 8.89,-9.836 9.362,-9.365
  pour cut-out: -3.5,3.5 -3.5,-16.708 -3.553,-16.762 9.362,-16.762 9.362,3.326 9.188,3.5
Bottom Layer:
  pour cut-out: 28.494,-10.923 30.367,-12.796 28.561,-12.796 28.502,-12.854 28.502,-10.932
  pour cut-out: 9.385,-9.503 11.729,-11.847 11.729,-11.937 11.719,-11.947 9.362,-11.947 9.362,-9.625 9.376,-9.611
  pour cut-out: -3.456,-16.762 -5.924,-16.762 -5.988,-16.826 -6.114,-16.7 -6.114,2.167 -3.23,2.167 -3.204,2.192 -0.097,-0.915 -0.097,-16.763 -0.097,-16.764
  pour cut-out: -3.57,-16.779 -3.553,-16.762 9.362,-16.762 9.362,-7.133 6.83,-4.601 6.668,-4.601 6.668,-2.505 6.394,-2.231 6.394,3.5 -3.45,3.5 -3.45,-16.762
  pour cut-out: -3.45,-16.762 9.362,-16.762 9.362,3.5 -3.45,3.5
  pour cut-out: 53.378,-12.388 53.378,-14.694 58.832,-20.148 59.176,-20.148 59.176,-17.984 53.581,-12.389 53.378,-12.389

## Silkscreen, mask and mechanical layers (free items; w line width, h text height)
Top Overlay:
  lines w0.254: 6.702,-27.9 cw(c6.771,-27.9) 6.722,-27.851 ; 15.372,-22.835 cw(c15.372,-23.017) 15.5,-22.888 ; 21.202,-43.635 6.702,-43.635 6.702,-22.835 21.202,-22.835 ; 21.209,-43.622 21.209,-22.822
  text "TUL-DUE / Integrated Sensor Project / 20210620 V3.1" at 5.803,-51.722 h1.2
Mechanical 1:
  lines w0.254: -3.5,-49.523 -3.5,0.5 cw(c-0.498,0.498) -0.495,3.5 58.513,3.5 cw(c58.513,0.5) 61.513,0.5 ; -0.5,-52.502 58.5,-52.502 ccw(c58.5,-49.502) 61.5,-49.502 ; 61.5,-49.478 61.5,0 61.5,0.5

## Dimensions
6.702,-22.835 to 6.702,-43.635 on Top Overlay
6.702,-22.835 to 21.202,-22.835 on Top Overlay
-0.5,-52.503 to -0.495,3.5 on Top Overlay
-3.5,3.5 to 61.5,0.5 on Top Overlay